# Altium PCB PCB2.PcbDoc
Units mm, origin at the board's own origin, x right, y up, seen from the top; angles counter-clockwise.
Board outline 96.52 x 86.36 mm, 2 copper layers (Top Layer, Bottom Layer); 31 components, 47 nets, 138 pads, 6 vias.
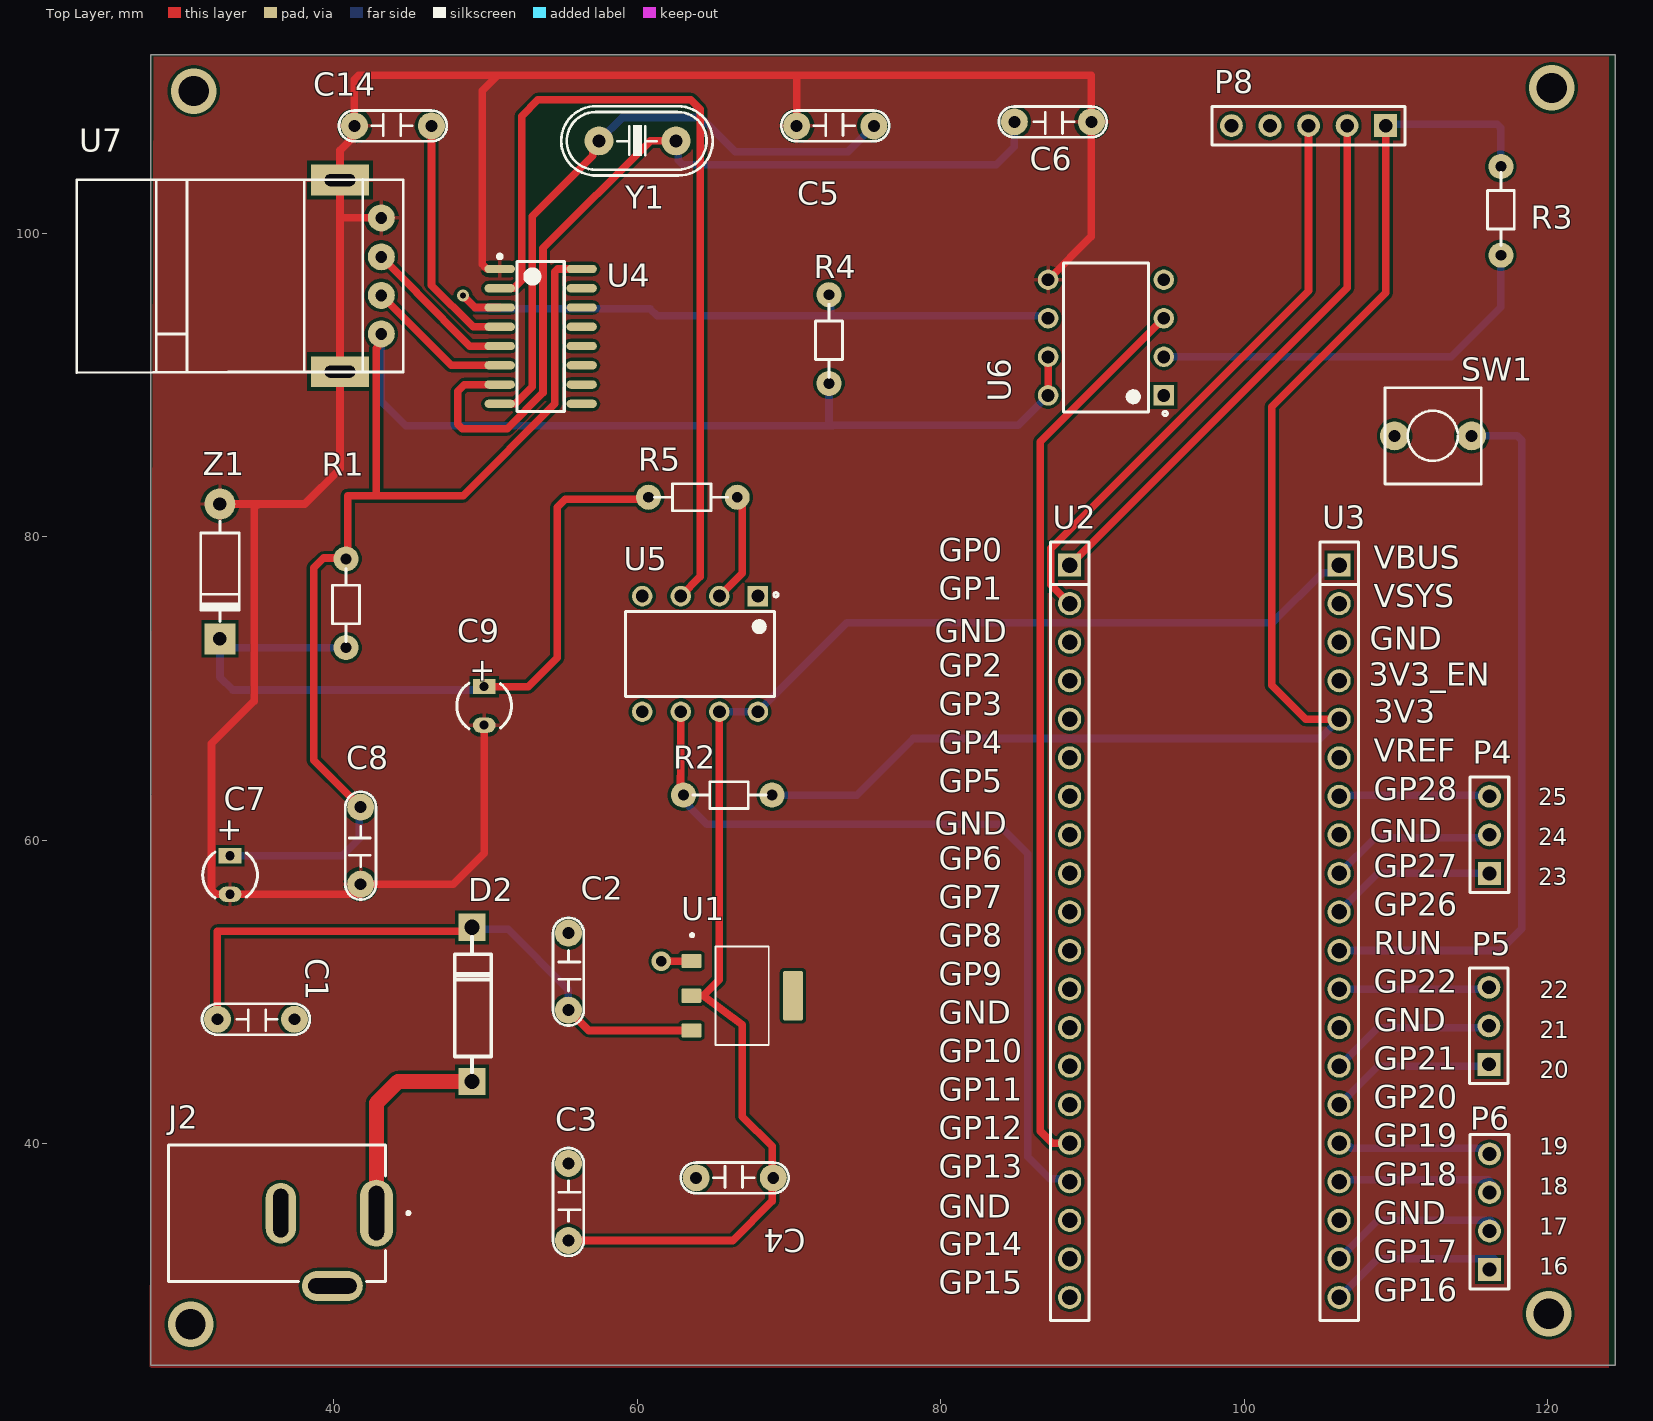
[diagram p0: Top Layer view]
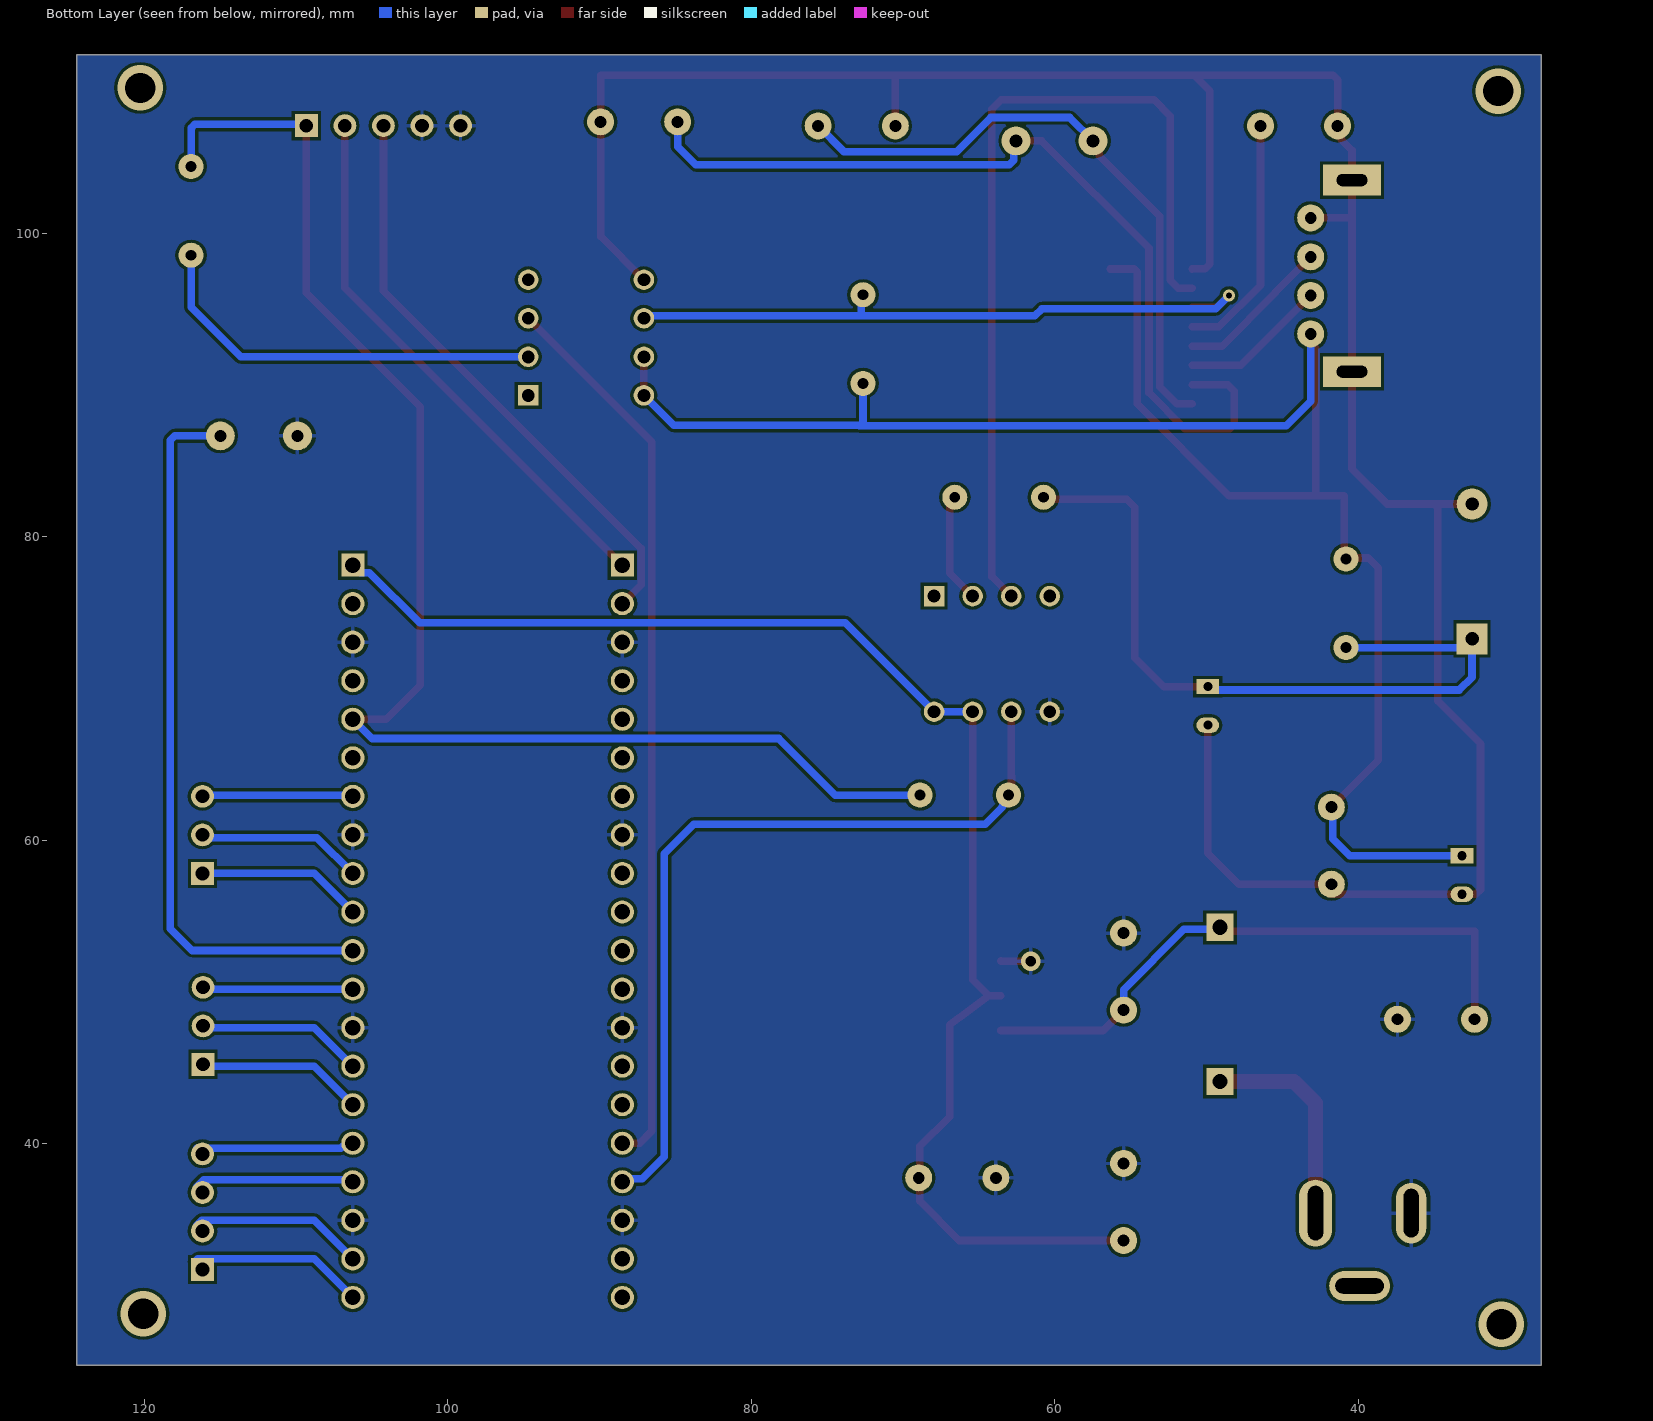
[diagram p1: Bottom Layer view, seen from below]
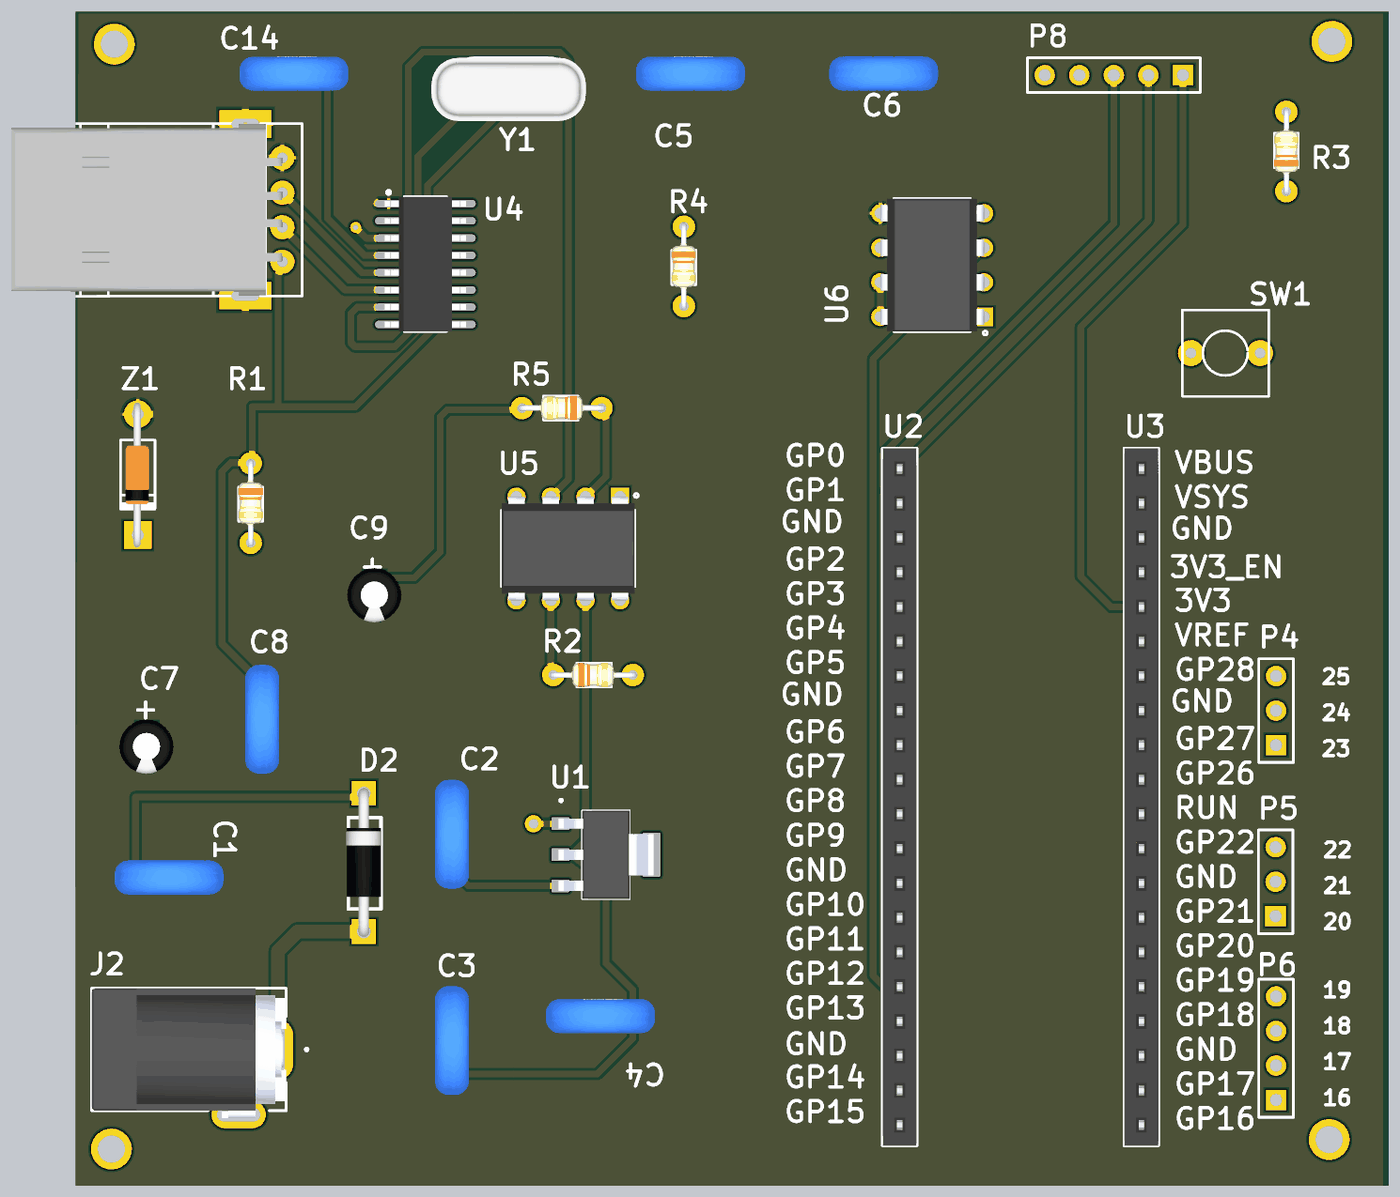
[diagram p2: 3D render of the assembled board from above, using the file's embedded part models]

## Layer stack, top to bottom
Top Solder: solder mask 0.0102, Solder Resist, Dk 3.5
Top Layer: signal copper 0.0356
Dielectric 1: dielectric 0.32, FR-4, Dk 4.8
Bottom Layer: signal copper 0.0356
Bottom Solder: solder mask 0.0102, Solder Resist, Dk 3.5

## Board outline
27.94,111.76 124.46,111.76 124.46,25.4 27.94,25.4

## Design rules (kind name [scope] priority, off if disabled: settings)
Clearance [All] p1: gap=0.2 ignorepadtopadclearanceinfootprint=FALSE
MinimumAnnularRing [All] p1: minimumring=0.2
PolygonConnect [All] p1: connectstyle=Relief reliefconductorwidth=0.254 reliefentries=4 polygonreliefangle="90 Angle" airgapwidth=0.254
RoutingVias [All] p1: holewidth=0.3 width=0.7 viastyle="Through Hole" minholewidth=0.3 minwidth=0.7 maxholewidth=0.3 maxwidth=0.7
SolderMaskExpansion [All] p1: expansion=0.102 istentingtop=FALSE
Width Power [InNetClass('All Nets')] p1: maxlimit=2 minlimit=0.25 preferedwidth=0.7
Width [All] p2: maxlimit=2 minlimit=0.25 preferedwidth=0.5
30 further rules are at their usual default settings.

## Components (designator, comment, footprint, x,y, rotation, side; value= is the part's Value field where it differs from the comment)
C1 "10uF" CN2 37.425,48.2 r180 top value=0.1uF
C2 "100nF" CN2 55.475,53.878 r270 top value=0.1uF
C3 "10uF" CN2 55.475,38.7 r270 top value=0.1uF
C4 "100nF" CN2 63.895,37.75 r0 top value=0.1uF
C5 "22" CN2 70.52,107.075 r0 top value=0.1uF
C6 "22" CN2 89.942,107.339 r180 top value=0.1uF
C7 "106" C3MM 33.178,57.708 r270 top
C8 "104" CN2 41.785,57.099 r90 top value=0.1uF
C9 "106" C3MM 49.925,68.85 r270 top
C14 "104" CN2 41.37,107.075 r0 top value=0.1uF
D2 "1N5819" DIODE/POW/1A 49.125,44.1 r90 top
J2 "" GCT_DCJ200-10-A-XX-K_REVA 36.275,35.425 r270 top
P4 "Header 3" HDR1X3 116.175,57.81 r90 top
P5 "Header 3" HDR1X3 116.14,45.225 r90 top
P6 "Header 4" HDR1X4 116.175,31.705 r90 top
P8 "Header 5" HDR1X5 109.33,107.092 r180 top
R1 "221" RES-1/8W-SMALL-2 40.945,75.489 r90 top
R2 "4k7" RES-1/8W-SMALL-2 66.102,63.1 r180 top
R3 "200" RES-1/8W-SMALL-2 116.8,101.6 r270 top
R4 "4k7" RES-1/8W-SMALL-2 72.775,92.9 r90 top
R5 "200" RES-1/8W-SMALL-2 63.55,82.475 r0 top
SW1 "SW" SW2 109.92,86.65 r0 top value="SW chip 2 pin"
U1 "AMS1117-5.0" SOT229P700X180-4N 66.925,49.75 r270 top
U2 "JP20" JP20-C1T 88.509,78.13 r270 top
U3 "JP20" JP20-C1T 106.269,78.13 r270 top
U4 "CH340G" SO16 53.65,93.2 r0 top
U5 "6N137" DIP762W50P254L977H451Q8 64.15,72.275 r270 top
U6 "6N137" DIP762W50P254L977H451Q8 90.9,93.125 r180 top
U7 "USB-A Through-Hole" USB-A 43.143,93.364 r90 top
Y1 "12MHz" XT2 60.028,106.086 r0 top
Z1 "Diode Zener" D1A 32.512,82.156 r90 top

## Footprints (in the part's own frame and the unit in brackets; to place one, negate y for a bottom-side part, rotate by r counter-clockwise, add the part's x,y. Pads: shape width x height; smd on the part's side, far side on the other; paste and mask are expansions set on the pad)
C3MM [mm]
  rect 1x1.5 hole 0.6: 1(-1.27,0)
  oval 1x1.5 hole 0.6: 2(1.27,0)
  silkscreen extent -1.5,-1.81 1.5,1.8, body extent -2,-2.03 1.99,1.97, height 7.01
CN2 [mil]
  round 70 hole 31: 1(0,0) 2(200,0)
  silkscreen extent -40,-40 240,40, body extent -54,-44 260,55, height 407
D1A [mil] "Diode 1A, W 100mil, L 350mil"
  round 80 hole 35: 1(0,0)
  rect 80x80 hole 35: 2(-350,0)
  silkscreen extent -305,-50 -45,50, body extent -386,-33 34,36, height 84
DIODE/POW/1A [mm]
  rect 1.8x1.8 hole 1: 1(0,0) 2(10.16,0)
  silkscreen extent 0.63,-1.27 9.52,1.14, body extent -0.38,-1.28 10.54,1.28, height 2.55
DIP762W50P254L977H451Q8 [mm]
  rect 1.35x1.35 / inner round 1.35 / far side rect 1.35x1.35 hole 0.85: 1(-3.81,3.81)
  round 1.35 hole 0.85: 2(-3.81,1.27) 3(-3.81,-1.27) 4(-3.81,-3.81) 5(3.81,-3.81) 6(3.81,-1.27) 7(3.81,1.27) 8(3.81,3.81)
  silkscreen extent -4.04,-4.9 2.8,5.14, body extent -3.81,-4.88 3.81,4.88, height 4.96
GCT_DCJ200-10-A-XX-K_REVA [mm]
  oval 4.4x2.2 hole 1 slot 3.6 at 0 deg: 1(0,6.55)
  oval 4x2 hole 1 slot 3.2 at 0 deg: 2(0,0.25)
  oval 2x4 hole 1 slot 3.2 at 90 deg: 3(4.8,3.65)
  silkscreen extent -4.5,-7.15 4.5,8.75, body extent -4.5,-7.15 5.05,7.15, height 11
HDR1X3 [mm] "Connector; Header; 3 Position"
  rect 1.5x1.5 hole 0.9: 1(0,0)
  round 1.5 hole 0.9: 2(2.54,0) 3(5.08,0)
  silkscreen extent -1.27,-1.27 6.35,1.27, body extent -1.27,-1.27 6.35,1.27, height 7
HDR1X4 [mm] "Connector; Header; 4 Position"
  rect 1.5x1.5 hole 0.9: 1(0,0)
  round 1.5 hole 0.9: 2(2.54,0) 3(5.08,0) 4(7.62,0)
  silkscreen extent -1.27,-1.27 8.89,1.27, body extent -1.27,-1.27 8.89,1.27, height 7
HDR1X5 [mm] "Connector; Header; 5 Position"
  rect 1.5x1.5 hole 0.9: 1(0,0)
  round 1.5 hole 0.9: 2(2.54,0) 3(5.08,0) 4(7.62,0) 5(10.16,0)
  silkscreen extent -1.27,-1.27 11.43,1.27
JP20-C1T [mm] "20 row, straight, gold plating"
  rect 1.52x1.52 hole 1.02: 1(0,0)
  round 1.52 hole 1.02: 2(2.54,0) 3(5.08,0) 4(7.62,0) 5(10.16,0) 6(12.7,0) 7(15.24,0) 8(17.78,0) 9(20.32,0) 10(22.86,0) 11(25.4,0) 12(27.94,0) 13(30.48,0) 14(33.02,0) 15(35.56,0) 16(38.1,0) 17(40.64,0) 18(43.18,0) 19(45.72,0) 20(48.26,0)
  silkscreen extent -1.52,-1.27 49.78,1.27, body extent -1.52,-1.25 49.78,1.25, height 8.51
RES-1/8W-SMALL-2 [mil] "R 1/8W, 2 pin, 200mil"
  round 65 hole 28: 1(-110,5) 2(120,5)
  silkscreen extent -95,-30 95,40, body extent -121,-30 131,41, height 75
SO16 [mm] "SOIC, 16-Leads, Body 9.90x3.91mm, Pitch 1.27mm, IPC Medium Density"
  oval 2x0.55 smd: 1(-2.7,4.445) 2(-2.7,3.175) 3(-2.7,1.905) 4(-2.7,0.635) 5(-2.7,-0.635) 6(-2.7,-1.905) 7(-2.7,-3.175) 8(-2.7,-4.445) 9(2.7,-4.445) 10(2.7,-3.175) 11(2.7,-1.905) 12(2.7,-0.635) 13(2.7,0.635) 14(2.7,1.905) 15(2.7,3.175) 16(2.7,4.445)
  silkscreen extent -2.82,-4.95 1.55,5.39, body extent -3,-4.95 3,4.95, height 1.4
SOT229P700X180-4N [mm]
  rrect15% 0.93x1.31 smd: 1(-2.29,-3.345) 2(0,-3.345) 3(2.29,-3.345)
  rrect15% 3.24x1.31 smd: 4(0,3.345)
  silkscreen extent -4.09,-3.4 3.25,1.75, body extent -3.25,-3.5 3.25,3.5, height 1.8
SW2 [mil] "SW button 2pin, 250x 250 mil"
  round 75 hole 31: 1(0,0) 2(200,0)
  silkscreen extent -25,-125 225,125
USB-A [mil]
  round 70 hole 31: 1(0,0) 2(100,0) 3(200,0) 4(301,0)
  rect 80x150 hole 31 slot 80 at 90 deg: 5(-98,107) 6(399,107)
  silkscreen extent -101,-57 401,790, body extent -97,0 399,784, height 177
XT2 [mil] "Footpin for Crystal 2 pin"
  round 75 hole 34: 1(-100,0) 2(100,0)
  silkscreen extent -198,-90 195,90, body extent -233,-93 213,90, height 138

## Part data
C1 C2 C3 C4 C5 C6 C8 C14: library part CN2, "Cap np 104 => 105pF"
C7 C9: library part "Cap Pol 3mm", "Polarized Capacitor (Axial)", LatestRevisionDate=17-Jul-2002, LatestRevisionNote="Re-released for DXP Platform.", PackageReference=POLAR0.8, Published=8-Jun-2000, Publisher="Altium Limited"
D2: library part "DIODE SCHOTTKY", "Schottky Diode"
J2: library part DCJ200-10-A-XX-K_REVA, "Power Barrel Connector Jack 2.05mm ID (0.081), 5.50mm OD (0.217) Through Hole, Right Angle", Package=None, Check_prices=https://www.snapeda.com/parts/DCJ200-10-A-K1-K/Global+Connector+Technology/view-part/?ref=eda, MF="Global Connector Technology", MP=DCJ200-10-A-K1-K, SnapEDA_Link=https://www.snapeda.com/parts/DCJ200-10-A-K1-K/Global+Connector+Technology/view-part/?ref=snap
P4 P5: "Header, 3-Pin", LatestRevisionDate=17-Jul-2002, LatestRevisionNote="Re-released for DXP Platform.", Publisher="Altium Limited"
P6: "Header, 4-Pin", LatestRevisionDate=17-Jul-2002, LatestRevisionNote="Re-released for DXP Platform.", Publisher="Altium Limited"
P8: "Header, 5-Pin", LatestRevisionDate=17-Jul-2002, LatestRevisionNote="Re-released for DXP Platform.", Publisher="Altium Limited"
R1 R2 R3 R4 R5: library part Res, "Res", Manufacturer="Generic Components", Class=Passive, Published=08/06/2000, Publisher="Altium Hobart Technology Centre", SubClass=R
SW1: library part SW2, "Switch button 2 pin"
U1: "1A LOW DROPOUT VOLTAGE REGULATOR", Package="SOT-223 Seeed Technology", Availability="Not in stock", Check_prices=https://www.snapeda.com/parts/AMS1117-5.0/ams/view-part/?ref=eda, MF=ams, MP=AMS1117-5.0, Price=None, SnapEDA_Link=https://www.snapeda.com/parts/AMS1117-5.0/ams/view-part/?ref=snap
U2 U3: "WR-PHD 2.54 mm Angled Socket Header", Manufacturer="W¨¹rth Elektronik eiSos GmbH", partNo=613020143121, ComponentLink1 Description=Manufacturer, ComponentLink1URL=http://www.we-online.com, ComponentLink2 Description=Datasheet, ComponentLink2URL=http://katalog.we-online.de/em/datasheet/6130xx143121.pdf, Created by="Karrer Zheng", Created Date="29 March 2013", NoPins=20
U4: "High and Low Side Driver", ComponentLink1Description="Manufacturer Link", ComponentLink1URL=http://www.irf.com/, ComponentLink2Description=Datasheet, ComponentLink2URL=http://www.irf.com/product-info/datasheets/data/ir2110.pdf, DatasheetVersion=PD60147J, LatestRevisionDate=04-Mar-2005, LatestRevisionNote="Stylized 3D Model Added.", Note="Pins 4, 8 and 14 are not connected", PackageDescription="DIP; 14 Leads; Row Spacing 7.62 mm; Pitch 2.54 mm", PackageReference=PDIP14, Published=8-Jun-2000, Publisher="Altium Limited"
U5 U6: "Logic Output Optoisolator 10Mbps Open Collector 5000Vrms 1 Channel 5kV/Âµs CMTI 8-DIP", Package="DIP-8 Isocom", Check_prices=https://www.snapeda.com/parts/6N137/Everlight/view-part/?ref=eda, MF="Everlight Electronics", MP=6N137, SnapEDA_Link=https://www.snapeda.com/parts/6N137/Everlight/view-part/?ref=snap
U7: library part "USB-A TH"
Y1: library part Crystal, "Crystal Oscillator", LatestRevisionDate=17-Jul-2002, LatestRevisionNote="Re-released for DXP Platform.", PackageReference=R38, Published=8-Jun-2000, Publisher="Altium Limited"
Z1: "Diode  Zener"

## Via types
v1: diameter 3, hole 2, Top Layer to Bottom Layer, 4 vias
v2: diameter 1.27, hole 0.711, Top Layer to Bottom Layer, 1 vias
v3: diameter 0.8, hole 0.4, Top Layer to Bottom Layer, 1 vias

## Nets (pads, with @x,y where several pads share a name; then routed paths per layer and width w, separated by ;. In a path a pad name is that pad's centre, name@x,y a point inside that pad or via, vN(x,y) a via of type N, cw(c..) or ccw(c..) an arc to the next point about the centre after c; other vN are vias at no path point)
3.3V: P8.1 R2.1 R3.1 U3.5 | length 95.1
  Top Layer w0.5: U3.5 104.055,67.97 101.825,70.2 101.825,88.575 109.33,96.08 P8.1
  Bottom Layer w0.5: R2.1 74.484,62.973 78.211,66.7 104.999,66.7 U3.5 ; P8.1 109.426,107.188 116.673,107.188 116.927,106.934 R3.1
3.3V_EN: U3.4
3.3V_LAP: C9.1 R1.1 R5.1 Z1.2 | length 50.9
  Top Layer w0.5: C9.1 52.832,70.12 54.737,72.025 54.737,81.937 55.277,82.477 60.631,82.477 R5.1@60.849,82.695
  Bottom Layer w0.5: R1.1 33.084,72.695 Z1.2 32.512,70.738 33.349,69.901 49.706,69.901 C9.1
GND_PICO: C1.1 C2.1 C3.1 C4.1 J2.2 P8.4 P8.5 SW1.1 U1.1 U2.3 U2.8 U2.13 U2.18 U3.3 U3.8 U3.13 U3.18 U5.5 | length 2.1
  Top Layer w0.5: v2(61.6,52.025) 61.608,52.033 63.572,52.033 U1.1 ; C4.1@63.679,37.4 ccw(c63.679,37.571) C4.1@63.8,37.45
GND_USB: C5.1 C6.1 C7.2 C8.1 C9.2 C14.1 U4.1 U6.5 U7.4 U7.5 U7.6 Z1.1 | length 173.4
  Top Layer w0.5: Z1.1 35.025,82.156 ; U7.4 40.425,101.01 ; C9.2 49.925,59.15 47.874,57.099 C8.1 41.785,56.438 C7.2 32.258,56.438 31.953,56.743 31.953,66.353 34.775,69.175 34.775,81.906 35.025,82.156 ; U4.1 50.94,97.655 50.092,97.655 49.784,97.963 49.784,109.375 50.809,110.4 ; C5.1 70.52,110.4 ; U6.5 89.942,99.787 C6.1 89.942,110.4 70.52,110.4 ; 35.025,82.156 38.087,82.156 40.425,84.494 U7.5 40.425,101.01 ; 40.425,101.01 U7.6 40.425,105.475 41.125,106.175 41.125,106.83 41.375,107.08 41.375,110.107 41.668,110.4 50.809,110.4 ; 50.809,110.4 70.52,110.4
  Bottom Layer w0.5: U7.6 U7.6@40.538,103.499 ; U7.4@43.028,101.01 U7.4
GPIO0: P8.2 U2.1 | length 36.5
  Top Layer w0.5: U2.1 106.79,96.411 P8.2
GPIO1: P8.3 U2.2 | length 39
  Top Layer w0.5: U2.2 87.274,76.825 87.274,79.223 104.25,96.198 P8.3
GPIO2: U2.4
GPIO3: U2.5
GPIO4: U2.6
GPIO5: U2.7
GPIO6: U2.9
GPIO7: U2.10
GPIO8: U2.11
GPIO9: U2.12
GPIO10: U2.14
GPIO11: U2.15
GPIO12: U2.16 U6.3 | length 59.2
  Top Layer w0.5: U2.16 87.37,40.03 86.563,40.837 86.563,86.248 U6.3
GPIO13: R2.2 U2.17 U5.6 | length 53.3
  Top Layer w0.5: R2.2@62.546,63.1 62.863,63.417 62.863,64.206 62.88,64.222 U5.6
  Bottom Layer w0.5: R2.2@62.9,62.75 62.965,62.75 63.48,62.236 63.48,62.17 64.6,61.05 83.8,61.05 85.744,59.106 85.744,39.152 87.21,37.686 88.314,37.686 U2.17
GPIO14: U2.19
GPIO15: U2.20
GPIO16: P6.1 U3.20 | length 11.6
  Bottom Layer w0.5: U3.20 108.809,32.41 115.525,32.41 115.53,32.405 116.5,32.405 P6.1@116.688,32.217
GPIO17: P6.2 U3.19 | length 11.5
  Bottom Layer w0.5: U3.19 108.809,34.95 116.224,34.95 P6.2@116.552,34.622
GPIO18: P6.3 U3.17 | length 10.5
  Bottom Layer w0.5: U3.17 106.404,37.625 116.089,37.625 P6.3@116.552,37.162
GPIO19: P6.4 U3.16 | length 10.4
  Bottom Layer w0.5: U3.16 106.464,39.835 106.939,39.835 107.072,39.702 P6.4@116.552,39.702
GPIO20: P5.1 U3.15 | length 11.1
  Bottom Layer w0.5: U3.15 108.809,45.11 P5.1@116.025,45.11 ; P5.1 116.254,45.34 P5.1@116.14,45.34
GPIO21: P5.2 U3.14 | length 10.8
  Bottom Layer w0.5: U3.14 108.809,47.65 P5.2@116.025,47.65
GPIO22: P5.3 U3.12 | length 9.8
  Bottom Layer w0.5: U3.12 P5.3@116.025,50.19 ; P5.3@116.08,50.145 P5.3@116.14,50.205
GPIO26: P4.1 U3.10 | length 11.2
  Bottom Layer w0.5: U3.10 108.809,57.81 P4.1 ; P4.1@116.1,57.736 P4.1 ; P4.1@116.25,57.735 P4.1
GPIO27: P4.2 U3.9 | length 11
  Bottom Layer w0.5: U3.9 108.634,60.175 116.15,60.175 P4.2@116.25,60.275
GPIO28: P4.3 U3.7 | length 10
  Bottom Layer w0.5: U3.7 106.344,62.965 P4.3@116.25,62.965
NetC1_2: C1.2 C2.2 D2.2 U1.3 | length 40.8
  Top Layer w0.5: C1.2 32.345,54 48.865,54 D2.2 ; C2.2 56.813,47.46 U1.3
  Bottom Layer w0.5: D2.2 49.26,54.125 51.5,54.125 55.475,50.15 C2.2
NetC5_2: C5.2 U4.8 Y1.1 | length 41
  Top Layer w0.5: U4.8 51.981,88.755 53.1,89.874 53.1,101.125 57.07,105.095 57.07,105.288 57.488,105.705 Y1.1
  Bottom Layer w0.5: Y1.1 59.027,107.625 64.225,107.625 66.475,105.375 73.9,105.375 C5.2
NetC6_2: C6.2 U4.7 Y1.2 | length 58.8
  Top Layer w0.5: U4.7 48.625,90.025 48.175,89.575 48.175,87.418 48.468,87.125 51.438,87.125 53.8,89.487 53.8,99 60.886,106.086 Y1.2
  Bottom Layer w0.5: Y1.2 62.725,105.928 62.725,104.818 63.018,104.525 83.675,104.525 84.862,105.712 C6.2
NetC14_2: C14.2 U4.4 | length 16.1
  Top Layer w0.5: C14.2 46.45,96.585 49.2,93.835 U4.4
NetD2_1: D2.1 J2.1 | length 14.1
  Top Layer w1: J2.1 42.825,42.675 44.25,44.1 D2.1
NetR3_2: R3.2 U6.2 | length 27
  Bottom Layer w0.5: U6.2 113.659,91.855 116.927,95.123 R3.2
NetR5_2: R5.2 U5.2 | length 7
  Top Layer w0.5: U5.2 66.929,77.594 R5.2@66.929,82.5
NetU4_5: U4.5 U7.3 | length 10.3
  Top Layer w0.5: U7.3 45.475,96.112 45.475,96.075 48.985,92.565 U4.5
NetU4_6: U4.6 U7.2 | length 9.7
  Top Layer w0.5: U7.2 47.752,91.295 U4.6
RUN: SW1.2 U3.11 | length 48.2
  Bottom Layer w0.5: U3.11 116.85,52.73 118.3,54.18 118.3,86.357 118.007,86.65 SW1.2
RX_USB: R4.2 U4.3 U6.6 | length 43.4
  Top Layer w0.5: v3(48.525,95.9) 49.32,95.105 U4.3
  Bottom Layer w0.5: v3(48.525,95.9) 49.4,95.025 60.85,95.025 61.317,94.558 72.775,94.558 86.927,94.558 U6.6 ; R4.2 72.775,95.821 72.775,94.614 72.825,94.564
TX_USB: U4.2 U5.3 | length 57.6
  Top Layer w0.5: U4.2 51.874,96.375 52.4,96.901 52.4,107.721 53.467,108.788 63.537,108.788 64.15,108.175 64.15,106.487 64.175,106.462 64.175,77.38 U5.3
V_LAP: C7.1 C8.2 R1.2 R4.1 U4.16 U6.7 U6.8 U7.1 | length 127.2
  Top Layer w0.5: C8.2 38.7,65.265 38.7,77.95 39.35,78.6 40.755,78.6 R1.2 40.925,78.644 40.925,82.704 42.825,82.704 ; U7.1 42.898,93.12 42.898,92.506 42.825,92.432 42.825,82.704 ; U4.16 54.77,97.645 54.581,97.456 54.581,88.756 48.529,82.704 43.146,82.704 42.825,82.704 ; U6.8 U6.7
  Bottom Layer w0.5: C7.1 40.578,58.978 41.698,60.098 41.698,62.092 C8.2 ; U7.1 43.143,88.932 44.763,87.312 72.648,87.312 72.902,87.312 ; 72.648,87.548 R4.1 ; 72.94,87.35 85.125,87.35 U6.8
VBUS: C3.2 C4.2 U1.2 U3.1 U5.7 U5.8 | length 94.9
  Top Layer w0.5: C3.2 66.295,33.62 68.9,36.225 68.9,39.82 66.929,41.791 66.929,47.845 64.355,49.75 ; U1.2 64.355,49.75 ; U5.7 65.42,50.815 64.355,49.75
  Bottom Layer w0.5: U5.7 U5.8 73.815,74.32 101.87,74.32 105.184,77.634 105.773,77.634 U3.1
VREF: U3.6
VSYS: U3.2
pads on no net: J2.3 U1.4 U4.9 U4.10 U4.11 U4.12 U4.13 U4.14 U4.15 U5.1 U5.4 U6.1 U6.4
copper on no net:
  other v1: 30.575,28.1 120.075,28.8 30.785,109.372 120.275,109.575

## Polygon pours and split planes (outlines as drawn)
GND_USB on Top Layer "USB_GND" (solid, remove dead copper, pour order 4): 28.15,111.875 28.15,111.625 124.05,111.625 124.05,25.225 27.9,25.225
GND_PICO on Bottom Layer "GND_PICO_L02_P003" (solid, pour order 3): 27.94,111.76 124.46,111.76 124.46,25.4 27.94,25.4

## Silkscreen, mask and mechanical layers (free items; w line width, h text height)
Top Overlay:
  text "GP0" at 79.883,78.384 h1.52
  text "VBUS" at 108.548,77.884 h1.52
  text "GP1" at 79.883,75.844 h1.52
  text "VSYS" at 108.548,75.344 h1.52
  text "GND" at 79.629,73.05 h1.52
  text "GND" at 108.294,72.55 h1.52
  text "GP2" at 79.883,70.764 h1.52
  text "3V3_EN" at 108.204,70.183 h1.52
  text "GP3" at 79.883,68.224 h1.52
  text "3V3" at 108.548,67.724 h1.52
  text "GP4" at 79.883,65.684 h1.52
  text "VREF" at 108.548,65.184 h1.52
  text "GP5" at 79.883,63.144 h1.52
  text "GP28" at 108.548,62.644 h1.52
  text "25" at 119.379,62.311 h1.1
  text "GND" at 79.629,60.35 h1.52
  text "GND" at 108.294,59.85 h1.52
  text "24" at 119.379,59.67 h1.1
  text "GP6" at 79.883,58.064 h1.52
  text "GP27" at 108.548,57.564 h1.52
  text "23" at 119.379,57.029 h1.1
  text "GP7" at 79.883,55.524 h1.52
  text "GP26" at 108.548,55.024 h1.52
  text "GP8" at 79.883,52.984 h1.52
  text "RUN" at 108.548,52.484 h1.52
  text "GP9" at 79.883,50.444 h1.52
  text "GP22" at 108.548,49.944 h1.52
  text "22" at 119.479,49.586 h1.1
  text "GND" at 79.883,47.904 h1.52
  text "GND" at 108.548,47.404 h1.52
  text "21" at 119.479,46.945 h1.1
  text "GP10" at 79.883,45.364 h1.52
  text "GP21" at 108.548,44.864 h1.52
  text "20" at 119.479,44.304 h1.1
  text "GP11" at 79.883,42.824 h1.52
  text "GP20" at 108.548,42.324 h1.52
  text "GP12" at 79.883,40.284 h1.52
  text "GP19" at 108.548,39.784 h1.52
  text "19" at 119.454,39.278 h1.1
  text "GP13" at 79.883,37.744 h1.52
  text "GP18" at 108.548,37.244 h1.52
  text "18" at 119.454,36.636 h1.1
  text "GND" at 79.879,35.104 h1.52
  text "GND" at 108.548,34.704 h1.52
  text "17" at 119.454,33.995 h1.1
  text "GP14" at 79.883,32.664 h1.52
  text "GP17" at 108.548,32.164 h1.52
  text "16" at 119.454,31.354 h1.1
  text "GP15" at 79.883,30.124 h1.52
  text "GP16" at 108.548,29.624 h1.52

## Text inside footprints (layer, text, board x,y; h text height)
C7: Top Overlay "+" at 32.5,61.5 h1.52 r270
C9: Top Overlay "+" at 49.163,72.025 h1.52 r270